# EAGLE board UVBoxSchematic (EAGLE 7.5.0)
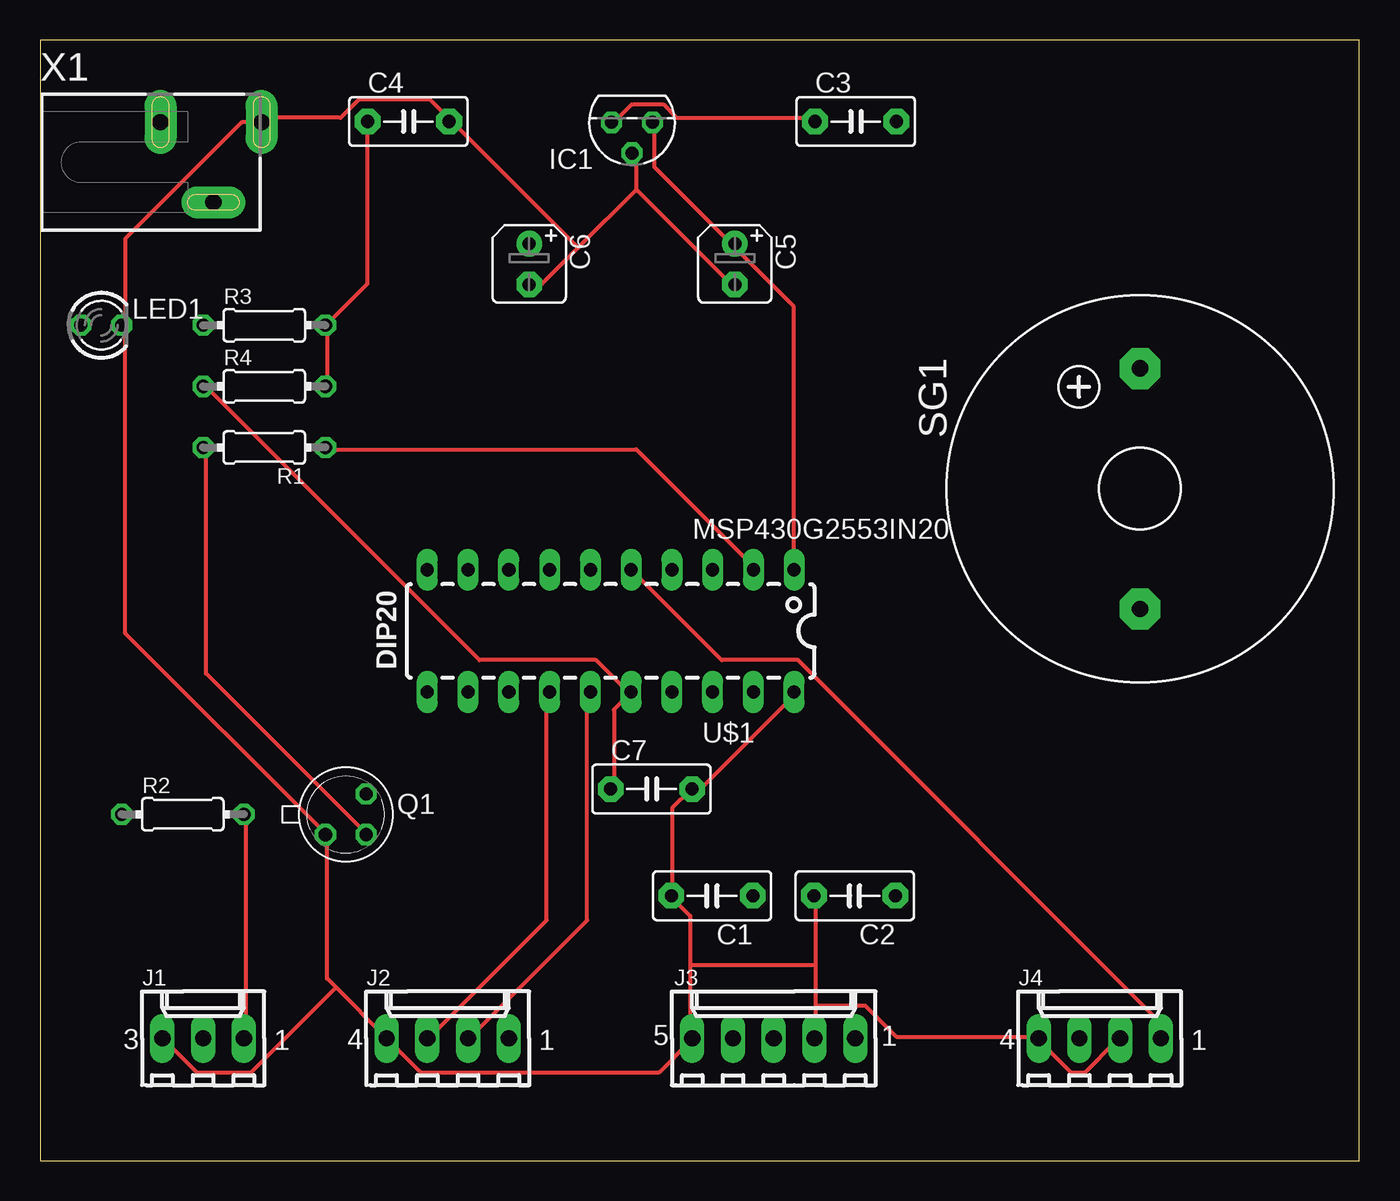
[diagram p0: board, top side]
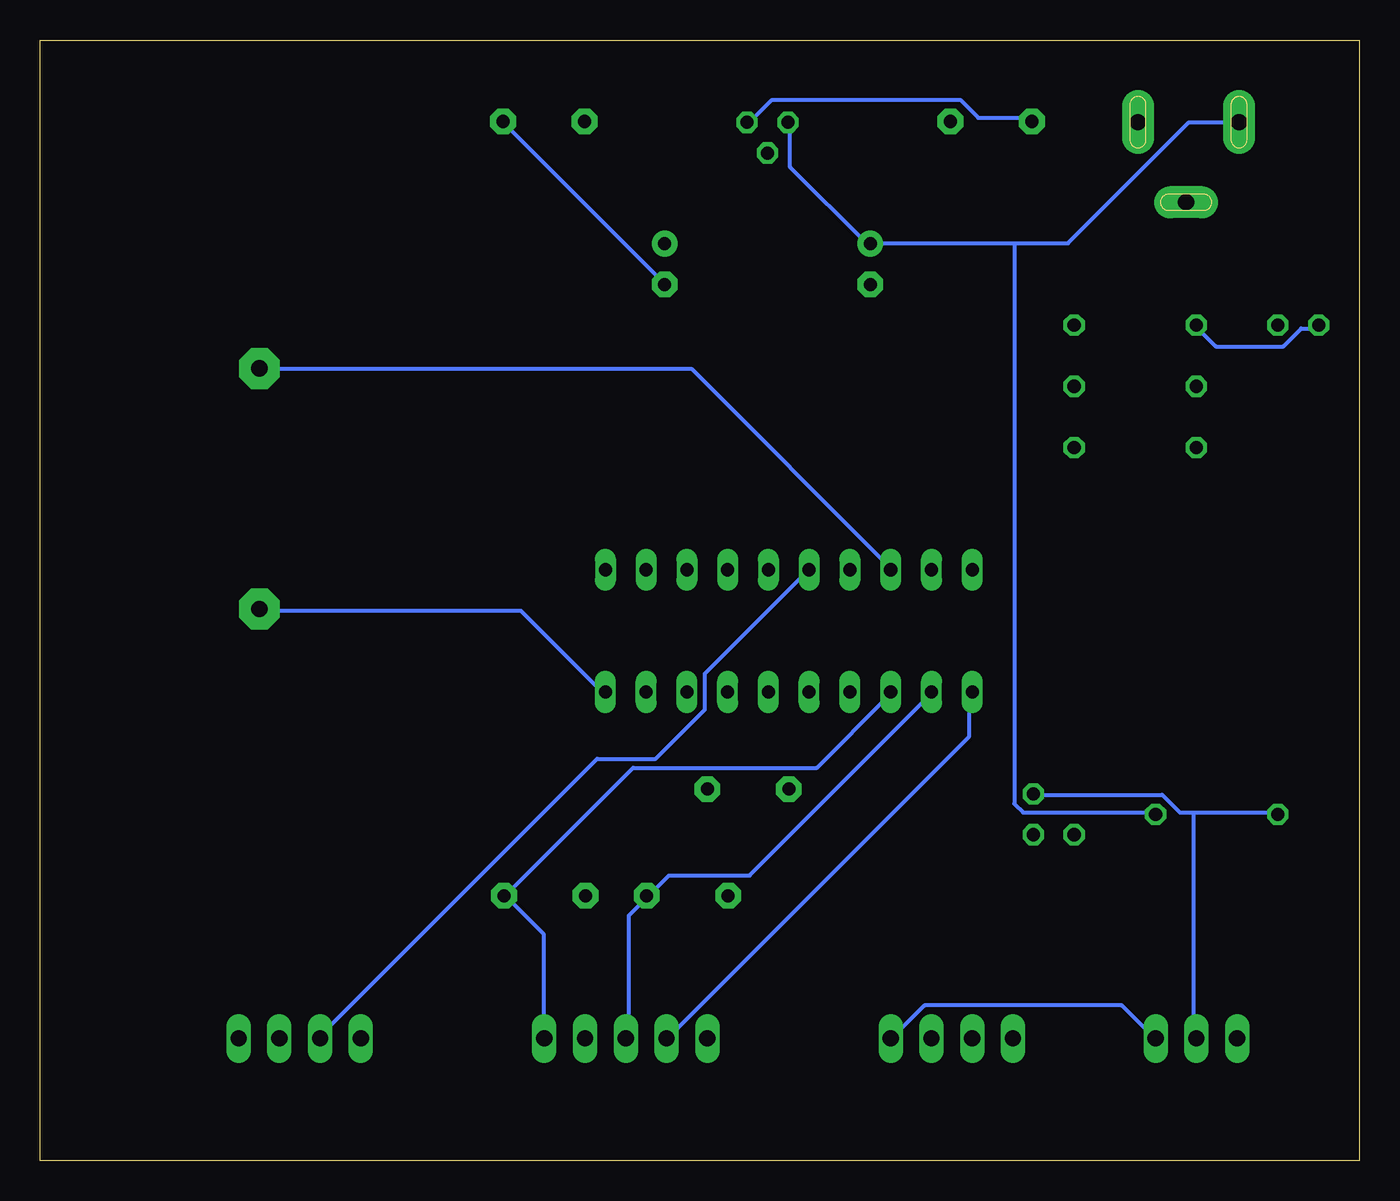
[diagram p1: board, bottom side, seen from below]

Size 82.22 x 69.84 mm. Coordinates in mm from the lower left corner, seen from the top.
Outline: 0,0 82.22,0 82.22,69.84 0,69.84 0,0
Copper layers (1*16): Top 0.035mm / dielectric 2mm / Bottom 0.035mm
Design rules "default *": minimum track width 10mil, minimum drill 24mil, track to track 12mil, track to pad 12mil, pad to pad 12mil, via to via 12mil, smd to smd 8mil, copper to edge 40mil, drill to drill 8mil, minimum pad ring 10mil, minimum via ring 8mil, stop-mask expansion 4mil, vias tented up to drill 0mil, thermal gap 10mil
Net classes: 0 default: clearance 0.205 mm

## Footprints (pad centres in the part's own frame; a part is rotated, then mirrored left to right if it is on the bottom)
C5B3 = drill 0.813 pad 1.6 octagon: 1 -2.54,0; 2 2.54,0
B45181A = drill 0.813 pad 1.6: + -1.27,0 | drill 0.813 pad 1.6 octagon: - 1.27,0
TO92 = drill 0.813 octagon: 1 -1.27,0; 2 0,1.905; 3 1.27,0
6410-03 = drill 1.016 long: 1 2.54,0; 2 0,0; 3 -2.54,0
6410-04 = drill 1.016 long: 1 3.81,0; 2 1.27,0; 3 -1.27,0; 4 -3.81,0
6410-05 = drill 1.016 long: 1 5.08,0; 2 2.54,0; 3 0,0; 4 -2.54,0; 5 -5.08,0
LED3MM = drill 0.813 octagon: A -1.27,0; K 1.27,0
TO18 = drill 0.813 octagon: 1 -1.27,-1.27; 2 1.27,-1.27; 3 1.27,1.27
0204/7 = drill 0.813 octagon: 1 -3.81,0; 2 3.81,0
F/CM04P = drill 1.016 pad 2.54 octagon: + 7.493,0; - -7.493,0
DIP20 = drill 0.813 pad 1.27 long: 1 -11.43,-3.81 | drill 0.813 long: 2 -8.89,-3.81; 3 -6.35,-3.81; 4 -3.81,-3.81; 5 -1.27,-3.81; 6 1.27,-3.81; 7 3.81,-3.81; 8 6.35,-3.81; 9 8.89,-3.81; 10 11.43,-3.81; 11 11.43,3.81; 12 8.89,3.81; 13 6.35,3.81; 14 3.81,3.81; 15 1.27,3.81; 16 -1.27,3.81; 17 -3.81,3.81; 18 -6.35,3.81; 19 -8.89,3.81; 20 -11.43,3.81
SCD-014-A = drill 1 pad 2 long: 1 -2.5,13.8; 2 -2.5,7.5; 3 2.5,10.8

## Placement (x,y rotation side)
C1  .001uF  [C5B3]  41.88,16.51 180 top
C2  0.001uF  [C5B3]  50.77,16.51 180 top
C3  .33uF  [C5B3]  50.83,64.77 0 top
C4  .1uF  [C5B3]  22.95,64.77 0 top
C5  47uF  [B45181A]  43.3,55.88 270 top
C6  10uF  [B45181A]  30.48,55.88 270 top
C7  0.001uF  [C5B3]  38.1,23.16 0 top
IC1  78L33  [TO92]  36.89,64.71 180 top
J1  22-27-2031-03  [6410-03]  10.16,7.62 0 top
J2  22-27-2041-04  [6410-04]  25.4,7.62 0 top
J3  22-27-2051-05  [6410-05]  45.72,7.62 0 top
J4  22-27-2041-04  [6410-04]  66.04,7.62 0 top
LED1  Red  [LED3MM]  3.81,52.07 0 top
Q1  2N4140  [TO18]  19.05,21.59 0 top
R1  1k  [0204/7]  13.97,44.45 180 top
R2  10k  [0204/7]  8.89,21.59 0 top
R3  470  [0204/7]  13.97,52.07 0 top
R4  10k  [0204/7]  13.97,48.26 0 top
SG1  Buzzer  [F/CM04P]  68.55,41.88 90 top
U$1  MSP430G2553IN20  [DIP20]  35.56,33.02 180 top
X1  A  [SCD-014-A]  0,62.23 270 top

## Library data of the parts
C1 = capacitor-wima; A: 10
C2-C4 C7 = capacitor-wima
C5 C6 R1-R4 = resistor
IC1 = linear
J1-J4 = con-molex; OC_FARNELL: unknown; OC_NEWARK: unknown
LED1 = led
Q1 = transistor-npn
SG1 = buzzer; OC_FARNELL: unknown; OC_NEWARK: unknown
U$1 = GuShH
X1 = con-shiua-chyuan; OC_FARNELL: unknown; OC_NEWARK: unknown

## Nets
GND: C1.2 C2.2 C3.2 C4.2 C5.- C6.- C7.2 IC1.2 J1.3 J2.4 J3.2 J3.5 J4.2 J4.4 LED1.K Q1.1 SG1.- U$1.20 X1.1
N$1: C3.1 C6.+ IC1.3 J1.1 J2.1 R2.2 X1.2
N$2: C2.1 J3.1 U$1.13
N$3: C1.1 J3.3 U$1.12
N$4: J3.4 U$1.11
N$5: J2.3 U$1.14
N$6: J2.2 U$1.15
N$7: LED1.A R3.1
N$8: C4.1 C5.+ IC1.1 R3.2 R4.2 U$1.1
N$9: J4.1 U$1.5
N$11: J1.2 Q1.3 R2.1
N$12: Q1.2 R1.2
N$13: R1.1 U$1.2
N$14: J4.3 U$1.6
N$15: SG1.+ U$1.8
N$19: C7.1 R4.1 U$1.16

## Tracks (layer width: path | path; a pad name or v marks a point on that pad's centre or on a via)
GND
  Top 0.254: 37.16,60.53 37.16,62.76 IC1.2 | 37.16,60.53 43.03,54.66 C5.- | 37.16,60.53 33.53,56.9 | 33.53,56.9 31.29,54.66 30.73,54.66 C6.- | 33.53,56.9 25.7,64.72 C4.2 25.43,65 24.31,66.12 19.84,66.12 18.72,65 13.97,65 X1.1 13.69,64.72 12.57,64.72 5.31,57.45 5.31,52.15 LED1.K 5.31,51.87 5.31,32.87 17.6,20.57 Q1.1 17.88,20.29 17.88,11.35 18.44,10.79 | J4.2 67.06,7.44 65.1,5.49 64.26,5.49 62.31,7.44 J4.4 62.03,7.72 53.37,7.72 51.41,9.68 48.34,9.68 | 48.34,12.19 48.34,16.38 C2.2 | 48.34,12.19 48.34,9.68 | 48.34,9.68 48.34,7.72 J3.2 | 18.44,10.79 21.51,7.72 J2.4 21.79,7.44 23.75,5.49 38.56,5.49 40.51,7.44 J3.5 40.51,7.72 40.51,12.19 | 18.44,10.79 13.13,5.49 9.78,5.49 7.82,7.44 J1.3 | 40.51,12.19 40.51,15.27 39.4,16.38 C1.2 39.4,16.66 39.4,21.97 40.51,23.09 C7.2 40.79,23.37 41.35,23.37 46.94,28.96 U$1.20 | 40.51,12.19 48.34,12.19
  Bottom 0.254: C3.2 53.37,64.72 43.31,54.66 C5.- | SG1.- 68.45,34.27 52.25,34.27 47.22,29.24 U$1.20
N$1
  Top 0.254: R2.2 12.85,21.41 12.85,7.72 J1.1 | C3.1 48.06,65 39.67,65 38.84,65.84 36.88,65.84 35.76,64.72 IC1.3
  Bottom 0.254: J2.1 29.06,7.72 27.1,9.68 14.81,9.68 12.85,7.72 J1.1 | IC1.3 35.48,64.44 35.48,61.92 30.73,57.17 C6.+ 30.45,57.17 21.51,57.17 | 21.51,57.17 18.16,57.17 10.62,64.72 7.54,64.72 X1.2 | 21.51,57.17 21.51,22.25 20.95,21.69 12.85,21.69 R2.2
N$2
  Bottom 0.254: U$1.13 29.34,28.96 33.81,24.49 45.26,24.49 53.09,16.66 C2.1 53.09,16.38 50.85,14.15 50.85,7.72 J3.1
N$3
  Bottom 0.254: U$1.12 26.82,28.96 38,17.78 43.03,17.78 44.15,16.66 C1.1 44.42,16.38 45.54,15.27 45.54,7.72 J3.3
N$4
  Bottom 0.254: U$1.11 24.31,28.96 24.31,26.44 43.03,7.72 J3.4
N$5
  Top 0.254: U$1.14 31.57,28.96 31.57,14.99 24.31,7.72 J2.3
N$6
  Top 0.254: U$1.15 34.09,28.96 34.09,14.99 26.82,7.72 J2.2
N$7
  Bottom 0.254: LED1.A 2.79,51.87 3.63,51.87 4.75,50.75 8.94,50.75 10.06,51.87 R3.1
N$8
  Top 0.254: R4.2 17.88,48.51 17.88,51.87 R3.2 17.88,52.15 20.4,54.66 20.4,64.72 C4.1 | U$1.1 46.94,37.06 46.94,53.26 43.31,56.9 C5.+ 43.03,57.17 38.28,61.92 38.28,64.44 IC1.1
  Bottom 0.254: C4.1 20.68,65 23.75,65 24.87,66.12 36.6,66.12 38,64.72 IC1.1
N$9
  Top 0.254: U$1.5 42.47,31.19 47.22,31.19 69.85,8.56 J4.1
N$11
  Bottom 0.254: 10.34,21.69 11.18,21.69 12.29,22.81 20.12,22.81 Q1.3 | 10.34,21.69 5.31,21.69 R2.1 | 10.34,21.69 10.34,7.72 J1.2
N$12
  Top 0.254: R1.2 10.34,44.32 10.34,30.35 20.12,20.57 Q1.2
N$13
  Top 0.254: U$1.2 44.42,37.06 37.16,44.32 17.88,44.32 R1.1
N$14
  Bottom 0.254: U$1.6 34.37,36.78 40.79,30.35 40.79,28.12 43.87,25.04 47.5,25.04 64.82,7.72 J4.3
N$15
  Bottom 0.254: U$1.8 29.34,37.06 41.63,49.35 68.45,49.35 SG1.+
N$19
  Top 0.254: R4.1 10.34,48.23 27.38,31.19 34.65,31.19 36.6,29.24 U$1.16 36.6,28.96 35.76,28.12 35.76,23.37 C7.1